# Altium PCB PCB_ESP32_custom_board_design_2024-04-01.pcbdoc (part 1 of 2)
Units mil, origin at the board's own origin, x right, y up, seen from the top; angles counter-clockwise.
Board outline 3915.1 x 2179.21 mil, 2 copper layers (Top Layer, Bottom Layer); 47 components, 48 nets, 216 pads, 112 vias.
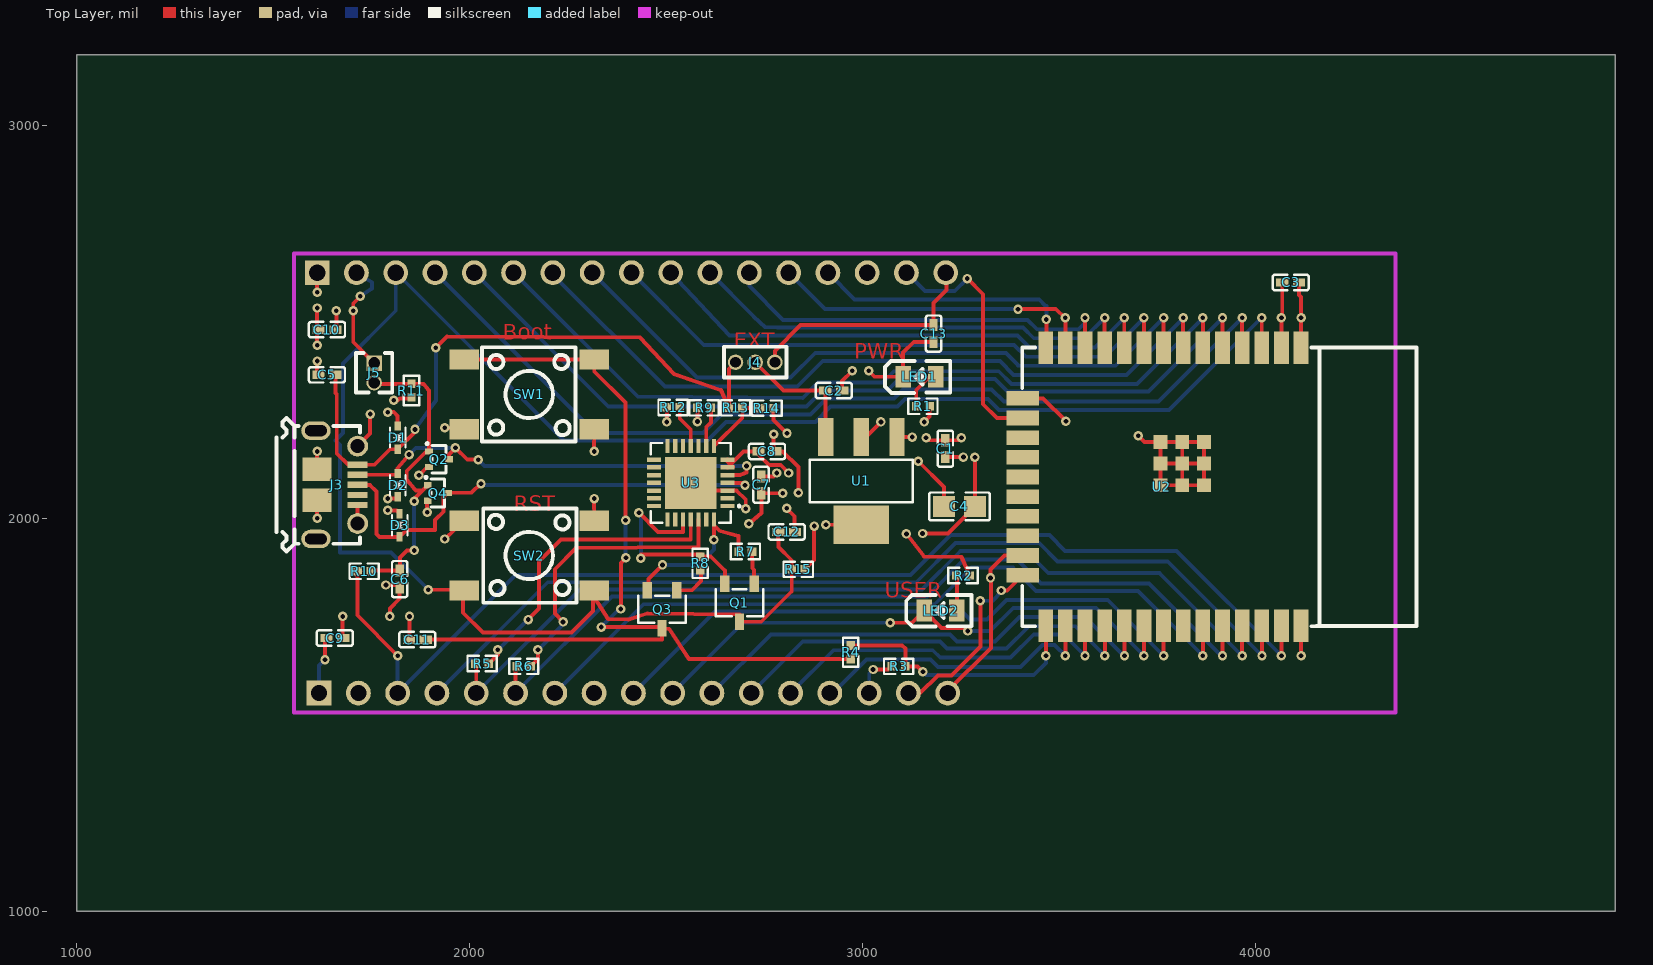
[diagram p0: Top Layer view]
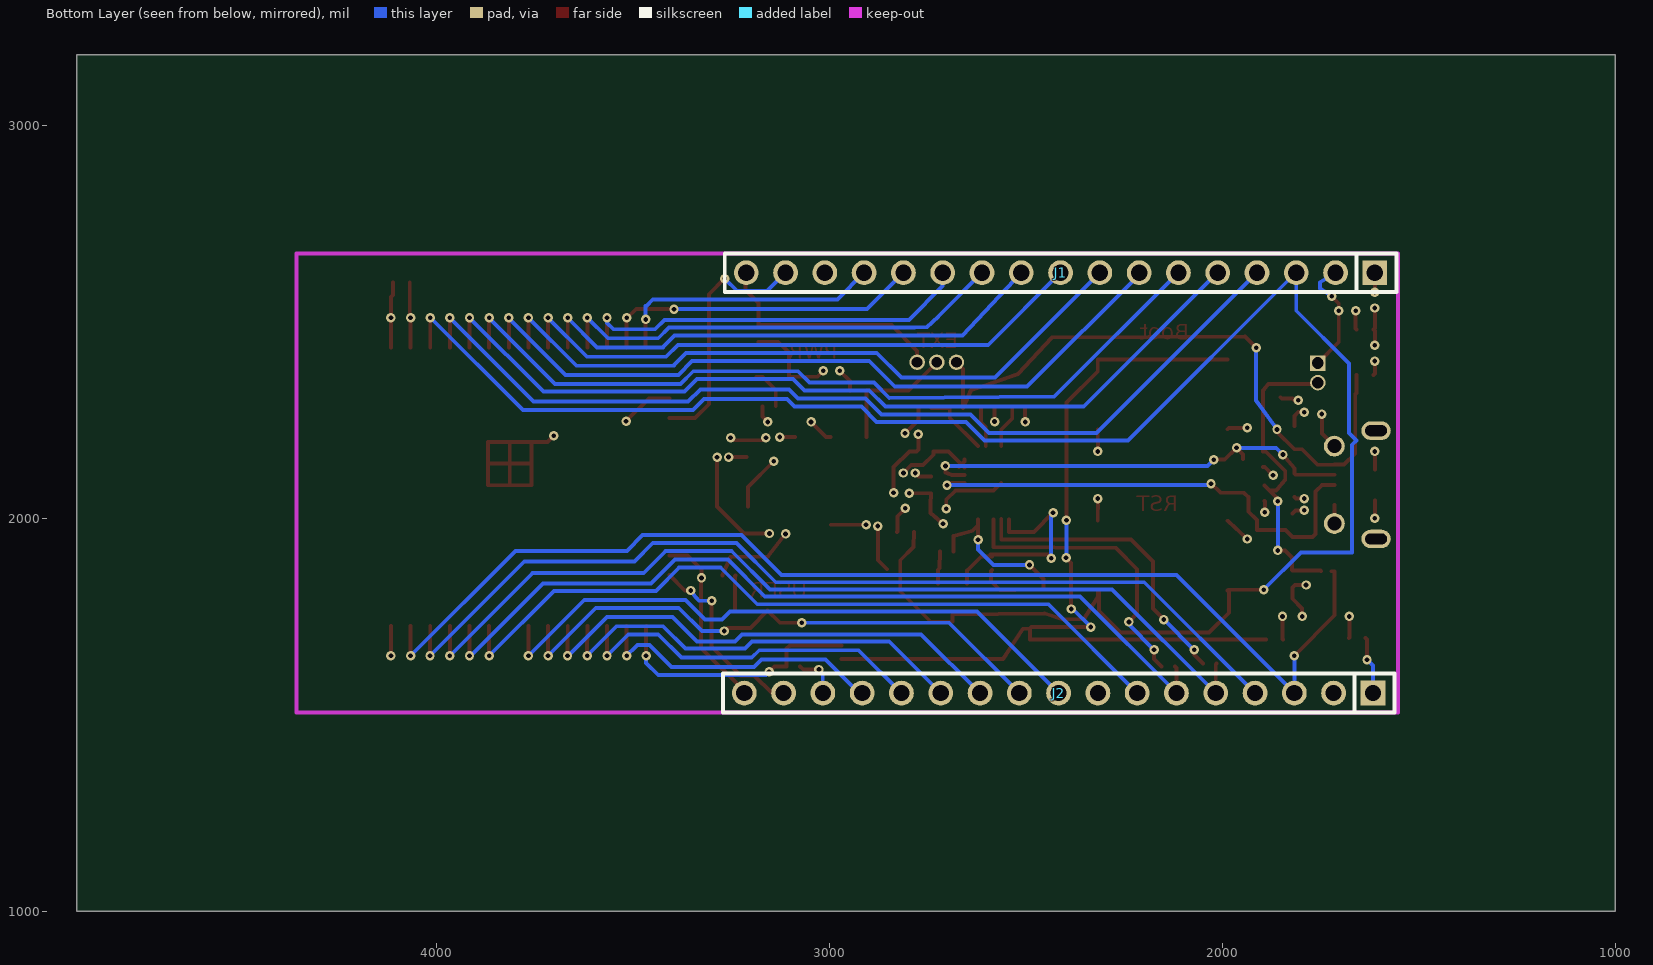
[diagram p1: Bottom Layer view, seen from below]

## Layer stack, top to bottom
Top Layer: signal copper (thickness not stored)
Dielectric: dielectric 12.6, FR-4, Dk 4.8
Bottom Layer: signal copper (thickness not stored)

## Board outline
4915.1,1000 1000,1000 1000,3179.21 4915.1,3179.21

## Components (designator, comment, footprint, x,y, rotation, side; value= is the part's Value field where it differs from the comment)
C1 "10uF" C0402 3210.42,2177 r270 top
C2 "10uF" C0402 2926.42,2325 r180 top
C3 "100nF" C0402 4089.42,2600 r180 top
C4 "22uF" C0805 3246.42,2030 r0 top
C5 "100nF" C0402 1636.42,2365 r0 top
C6 "100nF" C0402 1821.42,1845 r90 top
C7 "4.7uF" C0402 2741.42,2085 r270 top
C8 "100nF" C0402 2756.42,2170 r180 top
C9 "10uF" C0402 1656.42,1695 r180 top
C10 "10uF" C0402 1636.42,2480 r0 top
C11 "100nF" C0402 1866.42,1691 r0 top
C12 "100nF" C0402 2806.42,1965 r180 top
C13 "10uF" C0402 3180.42,2470 r90 top
D1 "LESD5D5.0CT1G" SOD-523_L1.2-W0.8-LS1.6-BI 1816.42,2205 r270 top
D2 "LESD5D5.0CT1G" SOD-523_L1.2-W0.8-LS1.6-BI 1816.42,2084 r90 top
D3 "LESD5D5.0CT1G" SOD-523_L1.2-W0.8-LS1.6-BI 1821.42,1982 r270 top
J1 "X6511WV-17H-C30D60" HDR-TH_17P-P2.54-V-M 2411.42,2625 r180 bottom
J2 "X6511WV-17H-C30D60" HDR-TH_17P-P2.54-V-M 2416.42,1555 r180 bottom
J3 "105017-0001" MICRO-USB-SMD_105017-0001 1661.42,2085 r270 top
J4 "210-1S-1*3Ppin Gold-plated" HDR-TH_3P-P1.27-V-M-1 2726.42,2397 r0 top
J5 "DZ127R-11-02-25" HDR-TH_2P-P1.27-V-M 1756.42,2370 r270 top
LED1 "0805G (Green)" LED0805-R-RD 3144.42,2360 r0 top
LED2 "FC-2012HRK-620D" LED0805-R-RD 3198.42,1765 r0 top
Q1 "SS8050_C2848182" SOT-23-3_L2.9-W1.6-P1.90-LS2.8-BR 2686.42,1785 r90 top
Q2 "2N7002T-7-F" SOT-523-3_L1.6-W0.8-P1.00-LS1.6-BR 1921.42,2150 r180 top
Q3 "SS8050_C2848182" SOT-23-3_L2.9-W1.6-P1.90-LS2.8-BR 2489.42,1768 r90 top
Q4 "2N7002T-7-F" SOT-523-3_L1.6-W0.8-P1.00-LS1.6-BR 1918.42,2064 r180 top
R1 "5.1kΩ" R0402 3153.42,2285 r0 top
R2 "560Ω" R0402 3255.42,1854 r0 top
R3 "22Ω" R0402 3091.42,1623 r180 top
R4 "22Ω" R0402 2969.42,1659 r270 top
R5 "0Ω" R0402 2031.42,1630 r0 top
R6 "0Ω" R0402 2137.42,1623 r0 top
R7 "10kΩ" R0402 2701.42,1915 r0 top
R8 "10kΩ" R0402 2586.42,1885 r270 top
R9 "1kΩ" R0402 2596.42,2281 r180 top
R10 "1kΩ" R0402 1731.42,1865 r0 top
R11 "10kΩ" R0402 1851.42,2325 r90 top
R12 "10kΩ" R0402 2517.42,2282 r180 top
R13 "22.1kΩ" R0402 2676.42,2281 r0 top
R14 "47.5kΩ" R0402 2756.42,2280 r180 top
R15 "10kΩ" R0402 2836.42,1870 r0 top
SW1 "PTS645SH50SMTR92LFS" KEY-SMD_4P-L6.0-W6.0-P4.50-LS9.0 2151.42,2315 r0 top
SW2 "PTS645SH50SMTR92LFS" KEY-SMD_4P-L6.0-W6.0-P4.50-LS9.0 2151.42,1905 r180 top
U1 "AMS1117-3.3_C347222" SOT-223-4_L6.5-W3.5-P2.30-LS7.0-BR 2996.42,2095 r90 top
U2 "ESP32-WROOM-32E(8MB)" WIFI-SMD_ESP32-WROOM-32E 3761.42,2080 r180 top
U3 "CP2102N-A02-GQFN28R" QFN-28_L5.0-W5.0-P0.50-TL-EP3.3 2562.42,2090 r180 top

## Footprints (in the part's own frame and the unit in brackets; to place one, negate y for a bottom-side part, rotate by r counter-clockwise, add the part's x,y. Pads: shape width x height; smd on the part's side, far side on the other; paste and mask are expansions set on the pad)
C0402 [mm]
  rect 0.79x0.54 smd paste-100 mask+0.051: 1(-0.545,0) 2(0.545,0)
  silkscreen extent -1.17,-0.5 1.17,0.5
C0805 [mm]
  rect 1.41x1.35 smd paste-100 mask+0.051: 1(-1,0) 2(1,0)
  silkscreen extent -1.96,-0.9 1.96,0.9
HDR-TH_2P-P1.27-V-M [mm]
  rect 1x1 hole 0.75 paste+0 mask+0.051: 1(-0.635,0)
  round 1 hole 0.75 paste+0 mask+0.051: 2(0.635,0)
  silkscreen extent -1.27,-1.18 1.27,1.18
HDR-TH_3P-P1.27-V-M-1 [mm]
  round 1 hole 0.7 paste+0 mask+0.051: 1(-1.27,0) 2(0,0) 3(1.27,0)
  silkscreen extent -2.03,-1 2.03,1
HDR-TH_17P-P2.54-V-M [mm]
  rect 1.6x1.6 hole 1.05 paste+0 mask+0.051: 1(20.32,0)
  round 1.6 hole 1.05 paste+0 mask+0.051: 2(17.78,0) 3(15.24,0) 4(12.7,0) 5(10.16,0) 6(7.62,0) 7(5.08,0) 8(2.54,0) 9(0,0) 10(-2.54,0) 11(-5.08,0) 12(-7.62,0) 13(-10.16,0) 14(-12.7,0) 15(-15.24,0) 16(-17.78,0) 17(-20.32,0)
  silkscreen extent -21.71,-1.25 21.71,1.25
KEY-SMD_4P-L6.0-W6.0-P4.50-LS9.0 [mm]
  rect 1.9x1.3 smd paste+0 mask+0.051: 1(-4.2,2.25) 2(4.2,2.25) 3(-4.2,-2.25) 4(4.2,-2.25)
  silkscreen extent -3.05,-3.05 2.98,3.05
LED0805-R-RD [mm]
  rect 1x1.4 smd paste+0 mask+0.051: 1(1.05,0) 2(-1.05,0)
  silkscreen extent -2.22,-1.04 1.99,1.01
MICRO-USB-SMD_105017-0001 [mm]
  rect 0.4x1.3 smd paste-100 mask+0.051: 1(-1.3,1.33) 2(-0.65,1.33) 3(0,1.33) 4(0.65,1.33) 5(1.3,1.33)
  round 1.35 hole 0.9 paste+0 mask+0.051: 6(-2.5,1.35) 7(2.5,1.35)
  oval 1.2x1.9 hole 0.7 slot 1.4 at 90 deg paste+0 mask+0.051: 8(3.5,-1.35) 9(-3.5,-1.35)
  rect 1.5x1.9 smd paste-100 mask+0.051: 10(-1,-1.28) 10(1,-1.28)
  silkscreen extent -4.32,-3.9 4.32,1.5
QFN-28_L5.0-W5.0-P0.50-TL-EP3.3 [mm]
  rect 0.905x0.28 smd paste-100 mask+0.051: 1(-2.377,1.5) 2(-2.377,1) 3(-2.377,0.5) 4(-2.377,0) 5(-2.377,-0.5) 6(-2.377,-1) 7(-2.377,-1.5) 15(2.377,-1.5) 16(2.377,-1) 17(2.377,-0.5) 18(2.377,0) 19(2.377,0.5) 20(2.377,1) 21(2.377,1.5)
  rect 0.28x0.905 smd paste-100 mask+0.051: 8(-1.5,-2.377) 9(-1,-2.377) 10(-0.5,-2.377) 11(0,-2.377) 12(0.5,-2.377) 13(1,-2.377) 14(1.5,-2.377) 22(1.5,2.377) 23(1,2.377) 24(0.5,2.377) 25(0,2.377) 26(-0.5,2.377) 27(-1,2.377) 28(-1.5,2.377)
  rect 3.35x3.35 smd paste-100 mask+0.051: 29(0,0)
  silkscreen extent -3.2,-2.58 2.58,2.58
R0402 [mm]
  rect 0.566x0.54 smd paste-100 mask+0.051: 1(-0.433,0) 2(0.433,0)
  silkscreen extent -0.94,-0.5 0.94,0.5
SOD-523_L1.2-W0.8-LS1.6-BI [mm]
  rect 0.6x0.4 smd paste+0 mask+0.051: 1(-0.75,0) 2(0.75,0)
  silkscreen extent -0.65,-0.5 0.65,0.5
SOT-23-3_L2.9-W1.6-P1.90-LS2.8-BR [mm]
  rect 1.07x0.6 smd paste+0 mask+0.051: 1(1.235,-0.95) 2(1.235,0.95) 3(-1.235,0)
  silkscreen extent -0.88,-1.54 0.88,1.54
SOT-223-4_L6.5-W3.5-P2.30-LS7.0-BR [mm]
  rect 2.47x0.98 smd paste+0 mask+0.051: 1(2.835,-2.3) 2(2.835,0) 3(2.835,2.3)
  rect 2.47x3.6 smd paste+0 mask+0.051: 4(-2.835,0)
  silkscreen extent -1.37,-3.33 1.37,3.33
SOT-523-3_L1.6-W0.8-P1.00-LS1.6-BR [mm]
  rect 0.51x0.4 smd paste+0 mask+0.051: 1(0.65,-0.5) 2(0.65,0.5) 3(-0.65,0)
  silkscreen extent -0.45,-1.08 0.83,0.9
WIFI-SMD_ESP32-WROOM-32E [mm]
  rect 0.95x2.1 smd paste+0 mask+0.051: 1(-9.002,-9) 2(-7.732,-9) 3(-6.462,-9) 4(-5.192,-9) 5(-3.922,-9) 6(-2.652,-9) 7(-1.382,-9) 8(-0.112,-9) 9(1.158,-9) 10(2.428,-9) 11(3.698,-9) 12(4.968,-9) 13(6.238,-9) 14(7.508,-9) 25(7.507,9) 26(6.237,9) 27(4.967,9) 28(3.697,9) 29(2.427,9) 30(1.157,9) 31(-0.113,9) 32(-1.383,9) 33(-2.653,9) 34(-3.923,9) 35(-5.193,9) 36(-6.463,9) 37(-7.733,9) 38(-9.003,9)
  rect 2.1x0.95 smd paste+0 mask+0.051: 15(9.002,-5.715) 16(9.002,-4.445) 17(9.002,-3.175) 18(9.002,-1.905) 19(9.002,-0.635) 20(9.002,0.635) 21(9.002,1.905) 22(9.002,3.175) 23(9.002,4.445) 24(9.002,5.715)
  rect 0.9x0.9 smd paste+0 mask+0.051: 39(-2.721,-0.1) 39(-2.721,-2.9) 39(-2.721,-1.5) 39(-1.322,-0.1) 39(-1.322,-2.9) 39(-1.321,-1.5) 39(0.079,-0.1) 39(0.079,-1.5) 39(0.079,-2.9)
  silkscreen extent -16.48,-9 9.02,9.02

## Via types
v1: diameter 24, hole 12, Top Layer to Bottom Layer, tented both sides, 112 vias

## Nets (pads, with @x,y where several pads share a name; then routed paths per layer and width w, separated by ;. In a path a pad name is that pad's centre, name@x,y a point inside that pad or via, vN(x,y) a via of type N, cw(c..) or ccw(c..) an arc to the next point about the centre after c; other vN are vias at no path point)
+3V3: C1.2 C3.2 C4.2 C7.1 C8.2 C9.2 C10.2 J1.2 J2.1 J5.1 R1.2 R2.2 R9.2 R15.2 U1.2 U1.4 U2.2 U3.6 U3.7 | length 1837.3
  Top Layer w10: v1(1631.42,1640) 1631.42,1691.46 C9.2@1634.96,1695 ; C10.2@1657.88,2480 1660.42,2482.54 v1(1660.42,2528) ; v1(1721.42,2565) 1703.42,2547 v1(1703.42,2528) 1703.42,2448 J5.1@1756.42,2395 ; v1(2579.42,2246) R9.2@2579.38,2281 R9.2@2579.38,2281 ; U3.6@2656.02,2129.37 2696.65,2170 2726.42,2170 C8.2@2734.96,2170 2734.96,2161.46 2761.42,2135 2791.42,2135 v1(2811.42,2115) ; U3.7@2656.02,2149.05 2656.02,2144.3 U3.6@2670.02,2130.3 ; C7.1@2741.42,2106.46 2772.88,2106.46 v1(2781.42,2115) ; R15.2@2853.46,1870 2876.42,1892.96 v1(2876.42,1980) ; v1(2906.42,1983.39) U1.4@2996.42,1983.39 ; U1.2@2996.42,2206.61 3008.03,2206.61 v1(3046.42,2245) ; v1(3111.42,1960) 3156.42,1903 3251.42,1901 R2.2@3272.42,1854 ; v1(3152.42,1961) 3216.79,1961 C4.2@3285.79,2030 v1(3285.79,2155) ; v1(3156.42,2245) 3170.46,2259.04 R1.2@3170.46,2285 ; C1.2@3210.42,2155.54 v1(3256.42,2155.54) ; U2.2@4065.85,2434.34 v1(4065.85,2510) 4067.96,2512.11 C3.2@4067.96,2600
  Bottom Layer w10: J2.1@1616.42,1555 1616.42,1625 v1(1631.42,1640) ; J1.2@1711.42,2625 1751.42,2600 1751.42,2585 v1(1721.42,2565)
+5V: C2.2 J4.2 U1.3 | length 326.8
  Top Layer w10: J4.2@2726.42,2397 2798.42,2325 C2.2@2904.96,2325 ; C2.2@2904.92,2325 U1.3@2905.82,2206.6
+5V_EXT: C13.2 J1.17 J4.3 | length 608.2
  Top Layer w10: J4.3@2776.42,2397 2776.42,2426 2841.88,2491.46 C13.2@3180.42,2491.46 3180.42,2548 3213.42,2581 3213.42,2623 J1.17@3211.42,2625
+5V_VBUS: C5.2 D1.2 J3.1 J4.1 R13.1 | length 1636.3
  Top Layer w10: C5.2@1657.88,2365 1658.42,2319 1661.42,2316 1661.42,2165 1690.22,2136.2 J3.1@1713.78,2136.18 1757.42,2136 1796.92,2175.5 D1.2@1816.42,2175.47 1860.42,2219.47 v1(1860.42,2226) ; v1(1913.42,2434) 1942.42,2463 2433.42,2460 2519.42,2367 2639.42,2326 R13.1@2659.38,2281 2659.38,2379.96 J4.1@2676.42,2397
  Bottom Layer w10: v1(1860.42,2226) 1913.42,2299 1913.42,2300 1913.42,2315 v1(1913.42,2434)
DTR: Q3.2 R7.1 U3.28 | length 422.2
  Top Layer w10: Q3.2@2454.52,1821.13 2454.52,1845.1 v1(2490.42,1881) ; v1(2621.42,1945) 2621.47,1945.05 U3.28@2621.48,1996.4 2621.47,1981.95 2635.42,1968 2683.42,1955 R7.1@2684.38,1915
  Bottom Layer w10: v1(2490.42,1881) 2582.42,1881 2621.42,1920 v1(2621.42,1945)
EN: C12.2 J1.3 Q1.3 R15.1 SW2.1 SW2.2 U2.3 | length 4997.5
  Top Layer w10: v1(1894.42,1818) 1984.49,1818 SW2.2@1986.07,1816.42 ; SW2.2@1983.12,1815.4 1983.12,1759.3 2033.42,1709 2258.42,1709 2313.42,1764 SW2.1@2313.82,1815.4 ; SW2.1@2316.78,1816.42 2316.82,1798.6 2352.42,1743 2404.42,1742 2452.42,1758 2686.42,1755 Q1.3@2686.42,1736.37 2741.82,1736.4 2819.42,1814 R15.1@2819.38,1870 2819.42,1893 2785.42,1927 C12.2@2784.92,1965 ; U2.3@4015.85,2434.34 v1(4015.85,2510)
  Bottom Layer w10: J1.3@1811.42,2625 1811.42,2528 1677.42,2394 1677.42,2217 1658.42,2198 1669.42,2187 1669.42,1913 1799.42,1913 v1(1894.42,1818) ; J1.3@1811.42,2626 2239.42,2198 2605.42,2198 2652.42,2245 2879.42,2245 2918.42,2284 3088.42,2284 3107.42,2303 3319.42,2303 3347.42,2275 3779.85,2275 v1@4015.85,2511
GND: C1.1 C2.1 C3.1 C4.1 C5.1 C6.1 C7.2 C8.1 C9.1 C10.1 C11.1 C12.1 C13.1 D1.1 D2.1 D3.1 J1.1 J1.15 J2.2 J2.8 J3.5 J3.6 J3.7 J3.8 J3.9 J3.10 LED1.2 Q2.2 Q4.2 R11.1 R12.2 R14.1 SW1.3 SW1.4 SW2.3 SW2.4 U1.1 U2.1 U2.15 U2.38 U2.39 U3.3 U3.29 | length 3509.4
  Top Layer w10: J3.10@1611.02,2045.63 v1(1611.42,2000) ; J3.10@1611.03,2124.37 v1(1611.42,2170) ; v1(1611.42,2400) 1611.42,2368.54 C5.1@1614.96,2365 ; v1(1611.42,2440) 1611.42,2476.46 C10.1@1614.96,2480 1611.42,2483.54 v1(1611.42,2535) ; v1(1611.42,2575) J1.1@1611.42,2625 ; v1(1676.42,1750) 1676.42,1696.46 C9.1@1677.88,1695 ; J3.5@1713.78,2033.8 J3.7@1714.52,1986.6 ; J3.6@1714.57,2183.43 1746.42,2215.27 v1(1746.42,2265) ; v1(1786.42,1830) 1814.96,1830 C6.1@1821.42,1823.54 1821.42,1795 1796.42,1770 v1(1796.42,1750) ; v1(1791.42,2020) 1812.95,2020 D3.1@1821.42,2011.53 ; v1(1791.42,2050) 1811.95,2050 D2.1@1816.42,2054.47 ; v1(1791.42,2270) 1806.42,2270 1816.42,2260 D1.1@1816.42,2234.53 ; v1(1806.42,2300) 1816.42,2300 1821.42,2305 1848.46,2305 R11.1@1851.42,2307.96 ; C11.1@1844.96,1691 1846.42,1692.46 v1(1846.42,1750) ; v1(1870.42,2109) 1891.74,2130.32 Q2.2@1895.83,2130.32 ; v1(1891.42,2015) 1891.42,2042.9 Q4.2@1892.83,2044.32 ; v1(1936.42,1947) SW2.4@1986.42,1993.58 ; v1(1936.42,2230) 1982.49,2230 SW1.3@1986.07,2226.42 ; v1(2316.42,2050) SW2.3@2316.78,1993.58 ; v1(2316.42,2170) SW1.4@2316.78,2226.42 ; R12.2@2500.38,2282 2501.42,2280.96 v1(2501.42,2245) ; U3.29@2562.42,2090 2582.1,2070.32 U3.3@2663.02,2070.32 ; U3.3@2656.02,2070.32 2678.42,2070 2702.42,2048 v1(2702.42,2024) ; v1(2710.42,1986) 2742.42,2013 2742.42,2035 C7.2@2741.42,2063.54 ; C7.2@2741.42,2063.54 v1(2796.42,2063.54) ; v1(2773.42,2214) 2773.42,2174.46 C8.1@2777.88,2170 2796.42,2170 2836.42,2130 v1(2836.42,2065) ; R14.1@2773.46,2280 2773.46,2249.96 v1(2807.42,2216) ; v1(2806.42,2025) 2826.42,2005 2826.42,1966.46 C12.1@2827.88,1965 ; C2.1@2947.88,2325 2947.88,2349.46 v1(2973.42,2375) ; v1(3015.42,2375) 3030.42,2360 3077.31,2360 LED1.2@3103.07,2360 3103.07,2421.65 3129.96,2448.54 C13.1@3180.42,2448.54 ; U1.1@3086.97,2206.61 v1(3126.42,2206.61) ; v1(3141.42,2145) 3207.05,2079.37 C4.1@3207.05,2030 ; v1(3161.42,2205) 3167.96,2198.46 C1.1@3210.42,2198.46 ; C1.1@3204.88,2198.46 C1.1@3210.42,2198.46 ; v1(3251.42,2205) 3244.88,2198.46 C1.1@3210.42,2198.46 ; U2.15@3406.99,2304.99 3459.43,2304.99 v1(3517.42,2247) ; v1(3701.42,2210) 3717.25,2194.18 U2.39@3758.33,2194.17 ; U2.39@3758.33,2139.06 U2.39@3813.45,2139.06 U2.39@3868.52,2139.1 ; C3.1@4110.88,2600 4110.88,2567.97 4115.85,2563 v1(4115.85,2510) U2.1@4115.85,2434.34 ; v1(4115.85,1650) U2.38@4115.85,1725.67 ; U2.39@3758.33,2194.17 U2.39@3758.33,2139.06 U2.39@3758.33,2083.94 U2.39@3813.45,2083.93 ; U2.39@3758.33,2194.17 U2.39@3813.45,2194.17 ; U2.39@3813.45,2083.93 3813.45,2139.07 U2.39@3813.45,2194.17 ; U2.39@3813.45,2083.93 U2.39@3868.56,2083.93 U2.39@3868.56,2139.06 U2.39@3868.56,2194.17 U2.39@3813.45,2194.17
I34: J1.6 U2.6 | length 2071.3
  Top Layer w10: U2.6@3865.85,2434.34 v1(3865.85,2510)
  Bottom Layer w10: J1.6@2111.42,2625 2427.42,2310 2847.42,2306 2886.42,2345 3050.42,2345 3079.42,2374 3346.42,2374 3378.42,2342 3697.85,2342 v1(3865.85,2510)
I35: J1.7 U2.7 | length 1899.2
  Top Layer w10: U2.7@3815.85,2434.34 v1(3815.85,2510)
  Bottom Layer w10: J1.7@2209.42,2622 2496.42,2335 2833.42,2335 2898.42,2400 3349.42,2400 3384.42,2365 3671.82,2365 v1@3813.82,2507
I36: J1.4 U2.4 | length 2446.1
  Top Layer w10: U2.4@3965.85,2434.34 v1(3965.85,2510)
  Bottom Layer w10: J1.4@1911.42,2625 2319.42,2217 2593.42,2217 2640.42,2264 2867.42,2264 2908.42,2305 3079.42,2305 3102.42,2328 3328.42,2328 3359.42,2297 3752.85,2297 v1@3965.85,2510
I38: J1.5 U2.5 | length 2241.4
  Top Layer w10: U2.5@3915.85,2434.34 v1(3915.85,2510)
  Bottom Layer w10: J1.5@2011.42,2625 2352.42,2284 2857.42,2284 2898.42,2325 3063.42,2325 3092.35,2353.93 3336.49,2353.93 3368.42,2322 3727.85,2322 v1(3915.85,2510)
IO0: R3.1 R4.1 U2.25 | length 661.2
  Top Layer w10: R4.1@2969.42,1676.04 3100.38,1676.04 3108.46,1667.96 R3.1@3108.46,1623 3139.42,1623 v1(3153.42,1609) ; U2.25@3465.85,1725.66 3466.42,1725.09 v1(3466.42,1650)
  Bottom Layer w10: v1(3153.42,1609) 3161.42,1601 3435.42,1601 3466.42,1632 v1(3466.42,1650)
IO0_BTN: C11.2 Q3.3 R4.2 SW1.1 SW1.2 | length 2380.5
  Top Layer w10: C11.2@1887.88,1691 2489.42,1691 Q3.3@2489.42,1719.37 2485.79,1723 v1(2334.42,1723) ; SW1.1@1986.07,2403.58 SW1.2@2316.78,2403.58 2316.77,2373.65 2396.42,2294 v1(2396.42,1995) ; v1(2384.42,1769) 2384.42,1886 v1(2397.42,1899) ; Q3.3@2489.42,1719.37 2507.42,1718 2557.42,1642 R4.2@2969.42,1641.96
  Bottom Layer w10: v1(2334.42,1723) 2380.42,1769 v1(2384.42,1769) ; v1(2396.42,1995) 2396.42,1900 v1(2397.42,1899)
IO0_CON: J2.15 R3.2 | length 118.3
  Top Layer w10: v1(3026.42,1615) 3066.38,1615 R3.2@3074.38,1623
  Bottom Layer w10: J2.15@3016.71,1552 3016.71,1605.29 v1(3026.42,1615)
IO2: J2.16 U2.24 | length 485.1
  Top Layer w10: J2.16@3116.42,1555 3146.42,1555 3191.42,1600 3226.42,1600 3299.42,1673 v1(3299.42,1790) ; v1(3352.42,1816) 3368,1816 U2.24@3406.99,1854.99
  Bottom Layer w10: v1(3299.42,1790) 3331.42,1790 3339.42,1798 v1(3352.42,1816)
IO4: J2.14 U2.26 | length 755.8
  Top Layer w10: v1(3515.85,1650) U2.26@3515.85,1725.67
  Bottom Layer w10: J2.14@2920.21,1551.5 3009.21,1640.5 3172.21,1640.5 3191.21,1621.5 3401.21,1621.5 3457.21,1677.5 3488.61,1677.5 v1@3519.61,1646.5
IO5: J2.11 U2.29 | length 1262.5
  Top Layer w10: U2.29@3665.82,1725.7 v1(3666.42,1650)
  Bottom Layer w10: J2.11@2615.42,1554 2766.42,1704 3222.42,1704 3240.42,1686 3336.42,1686 3399.42,1749 3565.42,1749 v1@3665.42,1649
IO12: J1.14 U2.14 | length 697.9
  Top Layer w10: U2.14@3465.85,2434.33 3467.42,2435.91 v1(3467.42,2506)
  Bottom Layer w10: J1.14@2911.42,2625 2979.42,2557 3449.42,2557 3465.85,2540.57 3467.42,2540.57 v1(3467.42,2506)
IO13: J1.16 U2.16 | length 639.4
  Top Layer w10: v1(3266.42,2610) 3306.42,2570 3306.42,2290 3341.43,2254.99 U2.16@3406.99,2254.99
  Bottom Layer w10: J1.16@3111.42,2625 3158.42,2578 3234.42,2578 v1(3266.42,2610)
IO14: J1.13 U2.13 | length 827.1
  Top Layer w10: v1(3395.42,2532) 3491.42,2532 v1(3515.85,2510) U2.13@3515.85,2434.34
  Bottom Layer w10: J1.13@2811.42,2625 2904.42,2532 v1(3395.42,2532)
IO15: J2.17 U2.23 | length 453.2
  Top Layer w10: J2.17@3214.92,1558.5 3326.42,1670 3326.42,1831.7 v1(3325.42,1848) 3325.42,1869 3361.42,1905 U2.23@3406.99,1904.99
IO16: J2.13 U2.27 | length 924.9
  Top Layer w10: v1(3565.85,1650) U2.27@3565.85,1725.67
  Bottom Layer w10: J2.13@2816.42,1555 2925.42,1664 3178.42,1664 3197.42,1645 3376.42,1645 3435.42,1704 3511.82,1704 v1@3565.82,1650
IO17: J2.12 U2.28 | length 1092.1
  Top Layer w10: U2.28@3615.82,1725.7 v1(3616.42,1650)
  Bottom Layer w10: J2.12@2716.42,1555 2847.42,1686 3196.42,1686 3214.42,1668 3366.42,1668 3423.42,1725 3541.42,1725 v1(3616.42,1650)
IO18: J2.10 LED2.2 U2.30 | length 1458.6
  Top Layer w10: v1(3070.42,1734) 3126.07,1734 LED2.2@3157.07,1765 3201.07,1721 3259.42,1721 v1(3267.42,1713) ; v1(3715.85,1650) U2.30@3715.85,1725.67
  Bottom Layer w10: J2.10@2516.42,1555 2695.42,1734 v1(3070.42,1734) ; v1(3267.42,1713) 3324.42,1713 3383.42,1772 3593.82,1772 v1@3715.82,1650
IO19: J2.9 U2.31 | length 1599.4
  Top Layer w10: v1(3765.85,1650) U2.31@3765.85,1725.67
  Bottom Layer w10: J2.9@2416.42,1555 2624.42,1763 3252.42,1763 3273.42,1742 3316.42,1742 3366.42,1792 3623.82,1792 v1@3765.82,1650
IO21: J2.7 U2.33 | length 1950
  Top Layer w10: v1(3865.85,1650) U2.33@3865.85,1725.67
  Bottom Layer w10: J2.7@2216.42,1555 2442.42,1781 3183.42,1781 3276.42,1874 3382.42,1874 3441.42,1815 3700.82,1815 v1@3865.82,1650
IO22: J2.4 U2.36 | length 2452.8
  Top Layer w10: U2.36@4015.82,1725.7 v1(4016.42,1650)
  Bottom Layer w10: J2.4@1916.42,1555 2198.42,1837 3136.42,1837 3236.42,1937 3449.42,1937 3496.42,1890 3776.42,1890 v1(4016.42,1650)
IO23: J2.3 R10.1 U2.37 | length 2978.6
  Top Layer w10: R10.1@1722.23,1865 R10.1@1714.38,1865 1714.38,1753.04 v1(1816.42,1650) ; v1(4065.85,1650) U2.37@4065.85,1725.67
  Bottom Layer w10: v1(1816.42,1650) J2.3@1816.42,1555 2116.42,1855 3121.42,1855 3223.42,1957 3475.42,1957 3515.42,1917 3798.82,1917 v1@4065.82,1650
IO25: J1.10 U2.10 | length 1343.6
  Top Layer w10: U2.10@3665.85,2434.34 v1(3665.85,2510)
  Bottom Layer w10: J1.10@2511.42,2625 2661.42,2465 2661.42,2464.86 3394.56,2464.86 3423.42,2436 3423.42,2435 3590.85,2435 v1(3665.85,2510)
IO26: J1.11 U2.11 | length 1169.8
  Top Layer w10: U2.11@3615.85,2434.34 v1(3615.85,2510)
  Bottom Layer w10: J1.11@2611.42,2625 2722.42,2514 2752.42,2486 2782.49,2484.93 3408.49,2484.93 3435.42,2458 3563.85,2458 v1(3615.85,2510)
IO27: J1.12 U2.12 | length 1029
  Top Layer w10: U2.12@3565.85,2434.34 v1(3565.85,2510)
  Bottom Layer w10: J1.12@2711.42,2625 2711.42,2591 2797.42,2505 3419.42,2505 3443.42,2481 3549.42,2481 3565.82,2497.4 v1@3565.82,2510
IO32: J1.8 U2.8 | length 1732.1
  Top Layer w10: U2.8@3765.85,2434.34 v1(3765.85,2510)
  Bottom Layer w10: J1.8@2311.42,2625 2578.42,2358 2816.42,2358 2879.35,2420.93 3364.49,2420.93 3395.42,2390 3395.42,2388 3643.85,2388 v1(3765.85,2510)
IO33: J1.9 U2.9 | length 1509.7
  Top Layer w10: U2.9@3715.85,2434.34 v1(3715.85,2510)
  Bottom Layer w10: J1.9@2411.42,2625 2595.42,2441 3385.42,2441 3415.42,2411 3616.85,2411 v1(3715.85,2510)
LED2_1: LED2.1 R2.1 | length 89.6
  Top Layer w10: R2.1@3238.38,1854 3239.77,1852.61 LED2.1@3239.77,1765
R1_1: LED1.1 R1.1 | length 104.6
  Top Layer w10: R1.1@3136.38,2285 3136.42,2326.2 3170.22,2360 LED1.1@3185.77,2360
R7_2: Q1.1 R7.2 | length 83.2
  Top Layer w10: R7.2@2718.42,1915 2719.42,1873 2723.82,1868.6 Q1.1@2723.82,1833.62
R8_2: Q3.1 R8.2 | length 100.1
  Top Layer w10: Q3.1@2526.82,1816.62 2565.05,1816.63 2588.42,1840 2588.42,1865.96 R8.2@2586.42,1867.96
R10_2: C6.2 J5.2 Q2.1 Q4.1 R10.2 R11.2 | length 805
  Top Layer w10: R10.2@1748.46,1865 1749.92,1866.46 C6.2@1821.42,1866.46 1822.42,1867.46 1822.42,1900 1840.42,1918 v1(1858.42,1918) ; J5.2@1756.42,2345 1759.38,2342.04 R11.2@1851.42,2342.04 1882.38,2342.04 1895.42,2326 1895.83,2325.41 Q2.1@1895.83,2169.68 1889.11,2169.68 1839.42,2120 1839.42,2098 1858.42,2076 1863.42,2071 1880.15,2071 Q4.1@1892.83,2083.68 1858.42,2049.27 v1(1858.42,2043)
  Bottom Layer w10: v1(1858.42,1918) v1(1858.42,2043)
RTS: Q1.2 R8.1 U3.24 | length 555.2
  Top Layer w10: v1(2430.42,2014) 2479.42,1965 2542.72,1965 U3.24@2542.74,1996.4 ; v1@2435.42,1899 2435.42,1907.5 R8.1@2589.92,1907.5 ; R8.1@2586.42,1902.04 2613.38,1902.04 2649.02,1866.4 Q1.2@2649.02,1833.62
  Bottom Layer w10: v1(2430.42,2014) 2435.42,2009 2435.42,1951 v1(2435.42,1898)
RXD: R5.2 U3.25 | length 774.6
  Top Layer w10: R5.2@2048.46,1630 2071.42,1652.96 v1(2071.42,1665) ; v1(2148.42,1742) 2176.42,1770 2176.42,1890 2232.42,1946 2562.42,1946 U3.25@2562.42,1998.4
  Bottom Layer w10: v1(2071.42,1665) v1(2148.42,1742)
RXD0: J2.6 R6.1 U2.34 | length 2187.8
  Top Layer w10: J2.6@2116.42,1555 2116.42,1619.04 R6.1@2120.38,1623 ; v1(3915.85,1650) U2.34@3915.85,1725.67
  Bottom Layer w10: J2.6@2114.42,1554 2361.42,1801 3164.42,1801 3258.42,1895 3392.42,1895 3453.42,1834 3728.82,1834 v1@3913.82,1649
TXD: R6.2 U3.26 | length 747.5
  Top Layer w10: R6.2@2154.46,1623 2173.42,1641.96 v1(2173.42,1665) ; v1(2237.42,1736) 2216.42,1757 2216.42,1870 2270.42,1924 2582.1,1927 U3.26@2582.11,1996.4
  Bottom Layer w10: v1(2173.42,1665) 2237.42,1729 v1(2237.42,1736)
TXD0: J2.5 R5.1 U2.35 | length 2360.6
  Top Layer w10: R5.1@2014.38,1630 2016.42,1627.96 J2.5@2016.42,1555 ; v1(3965.85,1650) U2.35@3965.85,1725.67
  Bottom Layer w10: J2.5@2016.42,1555 2280.42,1819 3151.42,1819 3248.42,1916 3417.42,1916 3473.42,1860 3755.82,1860 v1@3965.82,1650
U3_8: R13.2 R14.2 U3.8 | length 173.6
  Top Layer w10: U3.8@2621.48,2183.6 2693.46,2255.59 R13.2@2693.46,2281 2694.46,2280 R14.2@2739.38,2280
U3_9: R9.1 U3.9 | length 102.2
  Top Layer w10: U3.9@2601.79,2183.6 2601.79,2232.37 2613.42,2244 2613.46,2244.04 R9.1@2613.46,2281
U3_11: R12.1 U3.11 | length 110
  Top Layer w10: R12.1@2534.46,2282 2534.46,2253.96 2562.42,2226 U3.11@2562.42,2183.6
USB_DN: D2.2 J3.2 Q2.3 U3.5 | length 1150.2
  Top Layer w10: J3.2@1713.78,2110.6 1813.5,2110.6 D2.2@1816.42,2113.53 1816.42,2127 1831.42,2145 v1(1845.42,2162) ; Q2.3@1947.01,2150 1947.01,2162.59 v1(1963.42,2179) 1993.42,2149 v1(2021.42,2149) ; U3.5@2656.02,2109.68 2656.33,2110 2687.42,2110 2698.42,2114 2704.42,2116 v1(2704.42,2133)
  Bottom Layer w10: v1(1845.42,2162) 1862.42,2179 v1(1963.42,2179) ; v1(2021.42,2149) 2037.42,2133 v1(2704.42,2133)
USB_DP: D3.2 J3.3 Q4.3 U3.4 | length 1244.8
  Top Layer w10: J3.3@1713.78,2085 1745.42,2085 1762.42,2068 1762.42,1960 1769.95,1952.47 D3.2@1821.42,1952.47 1838.94,1970 1911.42,1970 1911.42,1995 1933.59,2017.17 1933.59,2053.58 Q4.3@1944.01,2064 2004.42,2065 v1(2028.42,2088) ; U3.4@2656.02,2090 2694.42,2090 v1(2700.42,2084)
  Bottom Layer w10: v1(2028.42,2088) 2032.42,2084 v1(2700.42,2084)
pads on no net: J3.4 U2.17 U2.18 U2.19 U2.20 U2.21 U2.22 U2.32 U3.1 U3.2 U3.10 U3.12 U3.13 U3.14 U3.15 U3.16 U3.17 U3.18 U3.19 U3.20 U3.21 U3.22 U3.23 U3.27

## Polygon pours and split planes (outlines as drawn)
GND on Internal Plane 2 (split plane): 1552.02,1505 1552.02,2674.1 4356.42,2674.1 4356.42,1505
GND on Internal Plane 2 (split plane): 140 vertices, not listed, extent 3176.84,1515.41 3256.02,1594.59
GND on Internal Plane 2 (split plane): 140 vertices, not listed, extent 3076.84,1515.41 3156.02,1594.59
GND on Internal Plane 2 (split plane): 140 vertices, not listed, extent 2976.84,1515.41 3056.02,1594.59
GND on Internal Plane 2 (split plane): 140 vertices, not listed, extent 2876.84,1515.41 2956.02,1594.59
GND on Internal Plane 2 (split plane): 140 vertices, not listed, extent 2776.84,1515.41 2856.02,1594.59
GND on Internal Plane 2 (split plane): 140 vertices, not listed, extent 2676.84,1515.41 2756.02,1594.59
GND on Internal Plane 2 (split plane): 140 vertices, not listed, extent 2576.84,1515.41 2656.02,1594.59
GND on Internal Plane 2 (split plane): 140 vertices, not listed, extent 2476.84,1515.41 2556.02,1594.59
GND on Internal Plane 2 (split plane): 140 vertices, not listed, extent 2376.84,1515.41 2456.02,1594.59
GND on Internal Plane 2 (split plane): 140 vertices, not listed, extent 2176.84,1515.41 2256.02,1594.59
GND on Internal Plane 2 (split plane): 140 vertices, not listed, extent 2076.84,1515.41 2156.02,1594.59
GND on Internal Plane 2 (split plane): 140 vertices, not listed, extent 1976.84,1515.41 2056.02,1594.59
GND on Internal Plane 2 (split plane): 140 vertices, not listed, extent 1876.84,1515.41 1956.02,1594.59
GND on Internal Plane 2 (split plane): 140 vertices, not listed, extent 1776.84,1515.41 1856.02,1594.59
GND on Internal Plane 2 (split plane): 141 vertices, not listed, extent 1576.92,1515.5 1655.92,1594.5
GND on Internal Plane 2 (split plane): 21 vertices, not listed, extent 2280.1,1518.68 2300.67,1539.25
GND on Internal Plane 2 (split plane): 21 vertices, not listed, extent 1680.1,1518.68 1700.67,1539.25
GND on Internal Plane 2 (split plane): 20 vertices, not listed, extent 2332.17,1518.68 2352.75,1539.25
GND on Internal Plane 2 (split plane): 20 vertices, not listed, extent 1732.17,1518.68 1752.75,1539.25
GND on Internal Plane 2 (split plane): 20 vertices, not listed, extent 2332.17,1570.75 2352.75,1591.32
GND on Internal Plane 2 (split plane): 21 vertices, not listed, extent 2280.1,1570.75 2300.67,1591.32
GND on Internal Plane 2 (split plane): 20 vertices, not listed, extent 1732.17,1570.75 1752.75,1591.32
GND on Internal Plane 2 (split plane): 21 vertices, not listed, extent 1680.1,1570.75 1700.67,1591.32
GND on Internal Plane 2 (split plane): 100 vertices, not listed, extent 3133.33,1588.9 3173.52,1629.1
GND on Internal Plane 2 (split plane): 100 vertices, not listed, extent 3006.33,1594.9 3046.52,1635.1
GND on Internal Plane 2 (split plane): 100 vertices, not listed, extent 1611.33,1619.9 1651.52,1660.1
GND on Internal Plane 2 (split plane): 100 vertices, not listed, extent 1796.33,1629.9 1836.52,1670.1
GND on Internal Plane 2 (split plane): 100 vertices, not listed, extent 4045.76,1629.9 4085.95,1670.1
GND on Internal Plane 2 (split plane): 100 vertices, not listed, extent 3996.33,1629.9 4036.52,1670.1
GND on Internal Plane 2 (split plane): 100 vertices, not listed, extent 3945.76,1629.9 3985.95,1670.1
GND on Internal Plane 2 (split plane): 100 vertices, not listed, extent 3895.76,1629.9 3935.95,1670.1
GND on Internal Plane 2 (split plane): 100 vertices, not listed, extent 3845.76,1629.9 3885.95,1670.1
GND on Internal Plane 2 (split plane): 100 vertices, not listed, extent 3745.76,1629.9 3785.95,1670.1
GND on Internal Plane 2 (split plane): 100 vertices, not listed, extent 3695.76,1629.9 3735.95,1670.1
GND on Internal Plane 2 (split plane): 100 vertices, not listed, extent 3646.33,1629.9 3686.52,1670.1
GND on Internal Plane 2 (split plane): 100 vertices, not listed, extent 3596.33,1629.9 3636.52,1670.1
GND on Internal Plane 2 (split plane): 100 vertices, not listed, extent 3545.76,1629.9 3585.95,1670.1
GND on Internal Plane 2 (split plane): 100 vertices, not listed, extent 3495.76,1629.9 3535.95,1670.1
GND on Internal Plane 2 (split plane): 100 vertices, not listed, extent 3446.33,1629.9 3486.52,1670.1
GND on Internal Plane 2 (split plane): 100 vertices, not listed, extent 2051.33,1644.9 2091.52,1685.1
GND on Internal Plane 2 (split plane): 100 vertices, not listed, extent 2153.33,1644.9 2193.52,1685.1
GND on Internal Plane 2 (split plane): 100 vertices, not listed, extent 3247.33,1692.9 3287.52,1733.1
GND on Internal Plane 2 (split plane): 100 vertices, not listed, extent 2314.33,1702.9 2354.52,1743.1
GND on Internal Plane 2 (split plane): 100 vertices, not listed, extent 3050.33,1713.9 3090.52,1754.1
GND on Internal Plane 2 (split plane): 100 vertices, not listed, extent 2217.33,1715.9 2257.52,1756.1
GND on Internal Plane 2 (split plane): 100 vertices, not listed, extent 2128.33,1721.9 2168.52,1762.1
GND on Internal Plane 2 (split plane): 100 vertices, not listed, extent 2364.33,1748.9 2404.52,1789.1
GND on Internal Plane 2 (split plane): 100 vertices, not listed, extent 3279.33,1769.9 3319.52,1810.1
GND on Internal Plane 2 (split plane): 100 vertices, not listed, extent 3332.33,1795.9 3372.52,1836.1
GND on Internal Plane 2 (split plane): 100 vertices, not listed, extent 1874.33,1797.9 1914.52,1838.1
GND on Internal Plane 2 (split plane): 100 vertices, not listed, extent 3305.33,1827.9 3345.52,1868.1
GND on Internal Plane 2 (split plane): 100 vertices, not listed, extent 2470.33,1860.9 2510.52,1901.1
GND on Internal Plane 2 (split plane): 180 vertices, not listed, extent 2377.33,1877.9 2455.52,1919.1
GND on Internal Plane 2 (split plane): 100 vertices, not listed, extent 1838.33,1897.9 1878.52,1938.1
GND on Internal Plane 2 (split plane): 44 vertices, not listed, extent 1626.98,1915.97 1651.39,1935.39
GND on Internal Plane 2 (split plane): 44 vertices, not listed, extent 1565.17,1915.97 1589.58,1935.39
GND on Internal Plane 2 (split plane): 100 vertices, not listed, extent 2601.33,1924.9 2641.52,1965.1
GND on Internal Plane 2 (split plane): 100 vertices, not listed, extent 3091.33,1939.9 3131.52,1980.1
GND on Internal Plane 2 (split plane): 100 vertices, not listed, extent 3132.33,1940.9 3172.52,1981.1
GND on Internal Plane 2 (split plane): 20 vertices, not listed, extent 1727.86,1954.55 1746.59,1973.28
GND on Internal Plane 2 (split plane): 20 vertices, not listed, extent 1682.55,1954.55 1701.28,1973.28
GND on Internal Plane 2 (split plane): 44 vertices, not listed, extent 1626.98,1959.01 1651.39,1978.43
GND on Internal Plane 2 (split plane): 44 vertices, not listed, extent 1565.17,1959.01 1589.58,1978.43
GND on Internal Plane 2 (split plane): 155 vertices, not listed, extent 2856.33,1959.9 2926.52,2003.49
GND on Internal Plane 2 (split plane): 186 vertices, not listed, extent 2376.33,1974.9 2450.52,2034.1
GND on Internal Plane 2 (split plane): 20 vertices, not listed, extent 1727.86,1999.86 1746.59,2018.59
GND on Internal Plane 2 (split plane): 20 vertices, not listed, extent 1682.55,1999.86 1701.28,2018.59
GND on Internal Plane 2 (split plane): 100 vertices, not listed, extent 1838.33,2022.9 1878.52,2063.1
GND on Internal Plane 2 (split plane): 100 vertices, not listed, extent 2680.33,2063.9 2720.52,2104.1
GND on Internal Plane 2 (split plane): 100 vertices, not listed, extent 2008.33,2067.9 2048.52,2108.1
GND on Internal Plane 2 (split plane): 156 vertices, not listed, extent 2761.33,2094.9 2831.52,2135.1
GND on Internal Plane 2 (split plane): 100 vertices, not listed, extent 2684.33,2112.9 2724.52,2153.1
GND on Internal Plane 2 (split plane): 100 vertices, not listed, extent 2001.33,2128.9 2041.52,2169.1
GND on Internal Plane 2 (split plane): 153 vertices, not listed, extent 3236.33,2134.9 3305.89,2175.64
GND on Internal Plane 2 (split plane): 100 vertices, not listed, extent 1825.33,2141.9 1865.52,2182.1
GND on Internal Plane 2 (split plane): 20 vertices, not listed, extent 1727.86,2151.4 1746.59,2170.13
GND on Internal Plane 2 (split plane): 20 vertices, not listed, extent 1682.55,2151.4 1701.28,2170.13
GND on Internal Plane 2 (split plane): 100 vertices, not listed, extent 1943.33,2158.9 1983.52,2199.1
GND on Internal Plane 2 (split plane): 44 vertices, not listed, extent 1626.98,2191.57 1651.39,2210.99
GND on Internal Plane 2 (split plane): 44 vertices, not listed, extent 1565.17,2191.57 1589.58,2210.99
GND on Internal Plane 2 (split plane): 20 vertices, not listed, extent 1727.86,2196.71 1746.59,2215.44
GND on Internal Plane 2 (split plane): 20 vertices, not listed, extent 1682.55,2196.71 1701.28,2215.44
GND on Internal Plane 2 (split plane): 100 vertices, not listed, extent 1840.33,2205.9 1880.52,2246.1
GND on Internal Plane 2 (split plane): 100 vertices, not listed, extent 3026.33,2224.9 3066.52,2265.1
GND on Internal Plane 2 (split plane): 100 vertices, not listed, extent 3136.33,2224.9 3176.52,2265.1
GND on Internal Plane 2 (split plane): 100 vertices, not listed, extent 2559.33,2225.9 2599.52,2266.1
GND on Internal Plane 2 (split plane): 44 vertices, not listed, extent 1626.98,2234.61 1651.39,2254.03
GND on Internal Plane 2 (split plane): 44 vertices, not listed, extent 1565.17,2234.61 1589.58,2254.03
GND on Internal Plane 2 (split plane): 236 vertices, not listed, extent 1728.65,2317.22 1784.21,2422.68
GND on Internal Plane 2 (split plane): 290 vertices, not listed, extent 2648.65,2369.22 2804.21,2424.78
GND on Internal Plane 2 (split plane): 100 vertices, not listed, extent 1893.33,2413.9 1933.52,2454.1
GND on Internal Plane 2 (split plane): 100 vertices, not listed, extent 3447.33,2485.9 3487.52,2526.1
GND on Internal Plane 2 (split plane): 100 vertices, not listed, extent 3495.76,2489.9 3535.95,2530.1
GND on Internal Plane 2 (split plane): 100 vertices, not listed, extent 3545.76,2489.9 3585.95,2530.1
GND on Internal Plane 2 (split plane): 100 vertices, not listed, extent 3595.76,2489.9 3635.95,2530.1
GND on Internal Plane 2 (split plane): 100 vertices, not listed, extent 3645.76,2489.9 3685.95,2530.1
GND on Internal Plane 2 (split plane): 100 vertices, not listed, extent 3695.76,2489.9 3735.95,2530.1
GND on Internal Plane 2 (split plane): 100 vertices, not listed, extent 3745.76,2489.9 3785.95,2530.1
GND on Internal Plane 2 (split plane): 100 vertices, not listed, extent 3795.76,2489.9 3835.95,2530.1
GND on Internal Plane 2 (split plane): 100 vertices, not listed, extent 3845.76,2489.9 3885.95,2530.1
GND on Internal Plane 2 (split plane): 100 vertices, not listed, extent 3895.76,2489.9 3935.95,2530.1
GND on Internal Plane 2 (split plane): 100 vertices, not listed, extent 3945.76,2489.9 3985.95,2530.1
GND on Internal Plane 2 (split plane): 100 vertices, not listed, extent 3995.76,2489.9 4035.95,2530.1
GND on Internal Plane 2 (split plane): 100 vertices, not listed, extent 4045.76,2489.9 4085.95,2530.1
GND on Internal Plane 2 (split plane): 100 vertices, not listed, extent 1640.33,2507.9 1680.52,2548.1
GND on Internal Plane 2 (split plane): 100 vertices, not listed, extent 1683.33,2507.9 1723.52,2548.1
GND on Internal Plane 2 (split plane): 100 vertices, not listed, extent 3375.33,2511.9 3415.52,2552.1
GND on Internal Plane 2 (split plane): 100 vertices, not listed, extent 1701.33,2544.9 1741.52,2585.1
GND on Internal Plane 2 (split plane): 218 vertices, not listed, extent 3171.84,2585.41 3286.52,2664.59
GND on Internal Plane 2 (split plane): 140 vertices, not listed, extent 3071.84,2585.41 3151.02,2664.59
GND on Internal Plane 2 (split plane): 140 vertices, not listed, extent 2871.84,2585.41 2951.02,2664.59
GND on Internal Plane 2 (split plane): 140 vertices, not listed, extent 2771.84,2585.41 2851.02,2664.59
GND on Internal Plane 2 (split plane): 140 vertices, not listed, extent 2671.84,2585.41 2751.02,2664.59
GND on Internal Plane 2 (split plane): 140 vertices, not listed, extent 2571.84,2585.41 2651.02,2664.59
GND on Internal Plane 2 (split plane): 140 vertices, not listed, extent 2471.84,2585.41 2551.02,2664.59
GND on Internal Plane 2 (split plane): 140 vertices, not listed, extent 2371.84,2585.41 2451.02,2664.59
GND on Internal Plane 2 (split plane): 140 vertices, not listed, extent 2271.84,2585.41 2351.02,2664.59
GND on Internal Plane 2 (split plane): 140 vertices, not listed, extent 2171.84,2585.41 2251.02,2664.59
GND on Internal Plane 2 (split plane): 140 vertices, not listed, extent 2071.84,2585.41 2151.02,2664.59
GND on Internal Plane 2 (split plane): 140 vertices, not listed, extent 1971.84,2585.41 2051.02,2664.59
GND on Internal Plane 2 (split plane): 140 vertices, not listed, extent 1871.84,2585.41 1951.02,2664.59
GND on Internal Plane 2 (split plane): 140 vertices, not listed, extent 1771.84,2585.41 1851.02,2664.59
GND on Internal Plane 2 (split plane): 140 vertices, not listed, extent 1671.84,2585.41 1751.02,2664.59
GND on Internal Plane 2 (split plane): 39 vertices, not listed, extent 1627.17,2585.5 1650.92,2609.25
GND on Internal Plane 2 (split plane): 39 vertices, not listed, extent 1571.92,2585.5 1595.67,2609.25
GND on Internal Plane 2 (split plane): 21 vertices, not listed, extent 2975.1,2588.68 2995.67,2609.25
GND on Internal Plane 2 (split plane): 20 vertices, not listed, extent 3027.17,2588.68 3047.75,2609.25
GND on Internal Plane 2 (split plane): 20 vertices, not listed, extent 3027.17,2640.75 3047.75,2661.32
GND on Internal Plane 2 (split plane): 21 vertices, not listed, extent 2975.1,2640.75 2995.67,2661.32
GND on Internal Plane 2 (split plane): 39 vertices, not listed, extent 1627.17,2640.75 1650.92,2664.5
GND on Internal Plane 2 (split plane): 39 vertices, not listed, extent 1571.92,2640.75 1595.67,2664.5
+3V3 on Internal Plane 1 (split plane): 1552.02,1505 1552.02,2674.1 4356.42,2674.1 4356.42,1505
+3V3 on Internal Plane 1 (split plane): 140 vertices, not listed, extent 3176.84,1515.41 3256.02,1594.59
+3V3 on Internal Plane 1 (split plane): 140 vertices, not listed, extent 3076.84,1515.41 3156.02,1594.59
+3V3 on Internal Plane 1 (split plane): 140 vertices, not listed, extent 2976.84,1515.41 3056.02,1594.59
+3V3 on Internal Plane 1 (split plane): 140 vertices, not listed, extent 2876.84,1515.41 2956.02,1594.59
+3V3 on Internal Plane 1 (split plane): 140 vertices, not listed, extent 2776.84,1515.41 2856.02,1594.59
+3V3 on Internal Plane 1 (split plane): 140 vertices, not listed, extent 2676.84,1515.41 2756.02,1594.59
+3V3 on Internal Plane 1 (split plane): 140 vertices, not listed, extent 2576.84,1515.41 2656.02,1594.59
+3V3 on Internal Plane 1 (split plane): 140 vertices, not listed, extent 2476.84,1515.41 2556.02,1594.59
+3V3 on Internal Plane 1 (split plane): 140 vertices, not listed, extent 2376.84,1515.41 2456.02,1594.59
+3V3 on Internal Plane 1 (split plane): 140 vertices, not listed, extent 2276.84,1515.41 2356.02,1594.59
+3V3 on Internal Plane 1 (split plane): 140 vertices, not listed, extent 2176.84,1515.41 2256.02,1594.59
+3V3 on Internal Plane 1 (split plane): 140 vertices, not listed, extent 2076.84,1515.41 2156.02,1594.59
+3V3 on Internal Plane 1 (split plane): 140 vertices, not listed, extent 1976.84,1515.41 2056.02,1594.59
+3V3 on Internal Plane 1 (split plane): 140 vertices, not listed, extent 1876.84,1515.41 1956.02,1594.59
+3V3 on Internal Plane 1 (split plane): 140 vertices, not listed, extent 1776.84,1515.41 1856.02,1594.59
+3V3 on Internal Plane 1 (split plane): 140 vertices, not listed, extent 1676.84,1515.41 1756.02,1594.59
+3V3 on Internal Plane 1 (split plane): 39 vertices, not listed, extent 1632.17,1515.5 1655.92,1539.25
+3V3 on Internal Plane 1 (split plane): 39 vertices, not listed, extent 1576.92,1515.5 1600.67,1539.25
+3V3 on Internal Plane 1 (split plane): 39 vertices, not listed, extent 1632.17,1570.75 1655.92,1594.5
+3V3 on Internal Plane 1 (split plane): 39 vertices, not listed, extent 1576.92,1570.75 1600.67,1594.5
+3V3 on Internal Plane 1 (split plane): 100 vertices, not listed, extent 3133.33,1588.9 3173.52,1629.1
+3V3 on Internal Plane 1 (split plane): 100 vertices, not listed, extent 3006.33,1594.9 3046.52,1635.1
+3V3 on Internal Plane 1 (split plane): 100 vertices, not listed, extent 1796.33,1629.9 1836.52,1670.1
+3V3 on Internal Plane 1 (split plane): 100 vertices, not listed, extent 4095.76,1629.9 4135.95,1670.1
+3V3 on Internal Plane 1 (split plane): 100 vertices, not listed, extent 4045.76,1629.9 4085.95,1670.1
+3V3 on Internal Plane 1 (split plane): 100 vertices, not listed, extent 3996.33,1629.9 4036.52,1670.1
+3V3 on Internal Plane 1 (split plane): 100 vertices, not listed, extent 3945.76,1629.9 3985.95,1670.1
+3V3 on Internal Plane 1 (split plane): 100 vertices, not listed, extent 3895.76,1629.9 3935.95,1670.1
+3V3 on Internal Plane 1 (split plane): 100 vertices, not listed, extent 3845.76,1629.9 3885.95,1670.1
+3V3 on Internal Plane 1 (split plane): 100 vertices, not listed, extent 3745.76,1629.9 3785.95,1670.1
+3V3 on Internal Plane 1 (split plane): 100 vertices, not listed, extent 3695.76,1629.9 3735.95,1670.1
+3V3 on Internal Plane 1 (split plane): 100 vertices, not listed, extent 3646.33,1629.9 3686.52,1670.1
+3V3 on Internal Plane 1 (split plane): 100 vertices, not listed, extent 3596.33,1629.9 3636.52,1670.1
+3V3 on Internal Plane 1 (split plane): 100 vertices, not listed, extent 3545.76,1629.9 3585.95,1670.1
+3V3 on Internal Plane 1 (split plane): 100 vertices, not listed, extent 3495.76,1629.9 3535.95,1670.1
+3V3 on Internal Plane 1 (split plane): 100 vertices, not listed, extent 3446.33,1629.9 3486.52,1670.1
+3V3 on Internal Plane 1 (split plane): 100 vertices, not listed, extent 2051.33,1644.9 2091.52,1685.1
+3V3 on Internal Plane 1 (split plane): 100 vertices, not listed, extent 2153.33,1644.9 2193.52,1685.1
+3V3 on Internal Plane 1 (split plane): 100 vertices, not listed, extent 3247.33,1692.9 3287.52,1733.1
+3V3 on Internal Plane 1 (split plane): 100 vertices, not listed, extent 2314.33,1702.9 2354.52,1743.1
+3V3 on Internal Plane 1 (split plane): 100 vertices, not listed, extent 3050.33,1713.9 3090.52,1754.1
+3V3 on Internal Plane 1 (split plane): 100 vertices, not listed, extent 2217.33,1715.9 2257.52,1756.1
+3V3 on Internal Plane 1 (split plane): 100 vertices, not listed, extent 2128.33,1721.9 2168.52,1762.1
+3V3 on Internal Plane 1 (split plane): 100 vertices, not listed, extent 1656.33,1729.9 1696.52,1770.1
+3V3 on Internal Plane 1 (split plane): 100 vertices, not listed, extent 1776.33,1729.9 1816.52,1770.1
+3V3 on Internal Plane 1 (split plane): 100 vertices, not listed, extent 1826.33,1729.9 1866.52,1770.1
+3V3 on Internal Plane 1 (split plane): 100 vertices, not listed, extent 2364.33,1748.9 2404.52,1789.1
+3V3 on Internal Plane 1 (split plane): 100 vertices, not listed, extent 3279.33,1769.9 3319.52,1810.1
+3V3 on Internal Plane 1 (split plane): 100 vertices, not listed, extent 3332.33,1795.9 3372.52,1836.1
+3V3 on Internal Plane 1 (split plane): 100 vertices, not listed, extent 1874.33,1797.9 1914.52,1838.1
+3V3 on Internal Plane 1 (split plane): 100 vertices, not listed, extent 1766.33,1809.9 1806.52,1850.1
+3V3 on Internal Plane 1 (split plane): 100 vertices, not listed, extent 3305.33,1827.9 3345.52,1868.1
+3V3 on Internal Plane 1 (split plane): 100 vertices, not listed, extent 2470.33,1860.9 2510.52,1901.1
+3V3 on Internal Plane 1 (split plane): 180 vertices, not listed, extent 2377.33,1877.9 2455.52,1919.1
+3V3 on Internal Plane 1 (split plane): 100 vertices, not listed, extent 1838.33,1897.9 1878.52,1938.1
+3V3 on Internal Plane 1 (split plane): 257 vertices, not listed, extent 1562.89,1915.58 1653.68,1978.82
+3V3 on Internal Plane 1 (split plane): 100 vertices, not listed, extent 2601.33,1924.9 2641.52,1965.1
+3V3 on Internal Plane 1 (split plane): 100 vertices, not listed, extent 1916.33,1926.9 1956.52,1967.1
+3V3 on Internal Plane 1 (split plane): 131 vertices, not listed, extent 1679.9,1951.9 1749.25,2021.23
+3V3 on Internal Plane 1 (split plane): 184 vertices, not listed, extent 2682.33,1965.9 2730.52,2044.1
+3V3 on Internal Plane 1 (split plane): 186 vertices, not listed, extent 2376.33,1974.9 2450.52,2034.1
+3V3 on Internal Plane 1 (split plane): 100 vertices, not listed, extent 1591.33,1979.9 1631.52,2020.1
+3V3 on Internal Plane 1 (split plane): 100 vertices, not listed, extent 1871.33,1994.9 1911.52,2035.1
+3V3 on Internal Plane 1 (split plane): 155 vertices, not listed, extent 1771.33,1999.9 1811.52,2070.1
+3V3 on Internal Plane 1 (split plane): 288 vertices, not listed, extent 2776.33,2004.9 2856.52,2085.1
+3V3 on Internal Plane 1 (split plane): 100 vertices, not listed, extent 1838.33,2022.9 1878.52,2063.1
+3V3 on Internal Plane 1 (split plane): 100 vertices, not listed, extent 2296.33,2029.9 2336.52,2070.1
+3V3 on Internal Plane 1 (split plane): 100 vertices, not listed, extent 2680.33,2063.9 2720.52,2104.1
+3V3 on Internal Plane 1 (split plane): 100 vertices, not listed, extent 2008.33,2067.9 2048.52,2108.1
+3V3 on Internal Plane 1 (split plane): 100 vertices, not listed, extent 1850.33,2088.9 1890.52,2129.1
+3V3 on Internal Plane 1 (split plane): 100 vertices, not listed, extent 2684.33,2112.9 2724.52,2153.1
+3V3 on Internal Plane 1 (split plane): 100 vertices, not listed, extent 3121.33,2124.9 3161.52,2165.1
+3V3 on Internal Plane 1 (split plane): 100 vertices, not listed, extent 2001.33,2128.9 2041.52,2169.1
+3V3 on Internal Plane 1 (split plane): 100 vertices, not listed, extent 1825.33,2141.9 1865.52,2182.1
+3V3 on Internal Plane 1 (split plane): 131 vertices, not listed, extent 1679.9,2148.76 1749.25,2218.09
+3V3 on Internal Plane 1 (split plane): 100 vertices, not listed, extent 1591.33,2149.9 1631.52,2190.1
+3V3 on Internal Plane 1 (split plane): 100 vertices, not listed, extent 2296.33,2149.9 2336.52,2190.1
+3V3 on Internal Plane 1 (split plane): 100 vertices, not listed, extent 1943.33,2158.9 1983.52,2199.1
+3V3 on Internal Plane 1 (split plane): 100 vertices, not listed, extent 3231.33,2184.9 3271.52,2225.1
+3V3 on Internal Plane 1 (split plane): 169 vertices, not listed, extent 3106.33,2184.9 3181.52,2226.71
+3V3 on Internal Plane 1 (split plane): 100 vertices, not listed, extent 3681.33,2189.9 3721.52,2230.1
+3V3 on Internal Plane 1 (split plane): 257 vertices, not listed, extent 1562.89,2191.18 1653.68,2254.42
+3V3 on Internal Plane 1 (split plane): 166 vertices, not listed, extent 2753.33,2193.9 2827.52,2236.1
+3V3 on Internal Plane 1 (split plane): 100 vertices, not listed, extent 1840.33,2205.9 1880.52,2246.1
+3V3 on Internal Plane 1 (split plane): 100 vertices, not listed, extent 1916.33,2209.9 1956.52,2250.1
+3V3 on Internal Plane 1 (split plane): 100 vertices, not listed, extent 2481.33,2224.9 2521.52,2265.1
+3V3 on Internal Plane 1 (split plane): 100 vertices, not listed, extent 3497.33,2226.9 3537.52,2267.1
+3V3 on Internal Plane 1 (split plane): 100 vertices, not listed, extent 1726.33,2244.9 1766.52,2285.1
+3V3 on Internal Plane 1 (split plane): 164 vertices, not listed, extent 1771.33,2249.9 1826.52,2320.1
+3V3 on Internal Plane 1 (split plane): 185 vertices, not listed, extent 1728.65,2317.22 1784.21,2385.16
+3V3 on Internal Plane 1 (split plane): 100 vertices, not listed, extent 2953.33,2354.9 2993.52,2395.1
+3V3 on Internal Plane 1 (split plane): 100 vertices, not listed, extent 2995.33,2354.9 3035.52,2395.1
+3V3 on Internal Plane 1 (split plane): 290 vertices, not listed, extent 2648.65,2369.22 2804.21,2424.78
+3V3 on Internal Plane 1 (split plane): 195 vertices, not listed, extent 1591.33,2379.9 1631.52,2460.1
+3V3 on Internal Plane 1 (split plane): 39 vertices, not listed, extent 1766.26,2404.84 1784.11,2422.68
+3V3 on Internal Plane 1 (split plane): 39 vertices, not listed, extent 1728.74,2404.84 1746.58,2422.68
+3V3 on Internal Plane 1 (split plane): 100 vertices, not listed, extent 1893.33,2413.9 1933.52,2454.1
+3V3 on Internal Plane 1 (split plane): 100 vertices, not listed, extent 3447.33,2485.9 3487.52,2526.1
+3V3 on Internal Plane 1 (split plane): 100 vertices, not listed, extent 3495.76,2489.9 3535.95,2530.1
+3V3 on Internal Plane 1 (split plane): 100 vertices, not listed, extent 3545.76,2489.9 3585.95,2530.1
+3V3 on Internal Plane 1 (split plane): 100 vertices, not listed, extent 3595.76,2489.9 3635.95,2530.1
+3V3 on Internal Plane 1 (split plane): 100 vertices, not listed, extent 3645.76,2489.9 3685.95,2530.1
+3V3 on Internal Plane 1 (split plane): 100 vertices, not listed, extent 3695.76,2489.9 3735.95,2530.1
+3V3 on Internal Plane 1 (split plane): 100 vertices, not listed, extent 3745.76,2489.9 3785.95,2530.1
+3V3 on Internal Plane 1 (split plane): 100 vertices, not listed, extent 3795.76,2489.9 3835.95,2530.1
+3V3 on Internal Plane 1 (split plane): 100 vertices, not listed, extent 3845.76,2489.9 3885.95,2530.1
+3V3 on Internal Plane 1 (split plane): 100 vertices, not listed, extent 3895.76,2489.9 3935.95,2530.1
+3V3 on Internal Plane 1 (split plane): 100 vertices, not listed, extent 3945.76,2489.9 3985.95,2530.1
+3V3 on Internal Plane 1 (split plane): 100 vertices, not listed, extent 3995.76,2489.9 4035.95,2530.1
+3V3 on Internal Plane 1 (split plane): 100 vertices, not listed, extent 4095.76,2489.9 4135.95,2530.1
+3V3 on Internal Plane 1 (split plane): 100 vertices, not listed, extent 3375.33,2511.9 3415.52,2552.1
+3V3 on Internal Plane 1 (split plane): 305 vertices, not listed, extent 1571.92,2514.9 1650.92,2664.5
+3V3 on Internal Plane 1 (split plane): 218 vertices, not listed, extent 3171.84,2585.41 3286.52,2664.59
+3V3 on Internal Plane 1 (split plane): 140 vertices, not listed, extent 3071.84,2585.41 3151.02,2664.59
+3V3 on Internal Plane 1 (split plane): 140 vertices, not listed, extent 2971.84,2585.41 3051.02,2664.59
+3V3 on Internal Plane 1 (split plane): 140 vertices, not listed, extent 2871.84,2585.41 2951.02,2664.59